# Altium PCB PCB1.PcbDoc
Units mil, origin at the board's own origin, x right, y up, seen from the top; angles counter-clockwise.
Board outline 10255 x 7345 mil, 2 copper layers (Top Layer, Bottom Layer); 112 components, 0 nets, 480 pads, 0 vias.
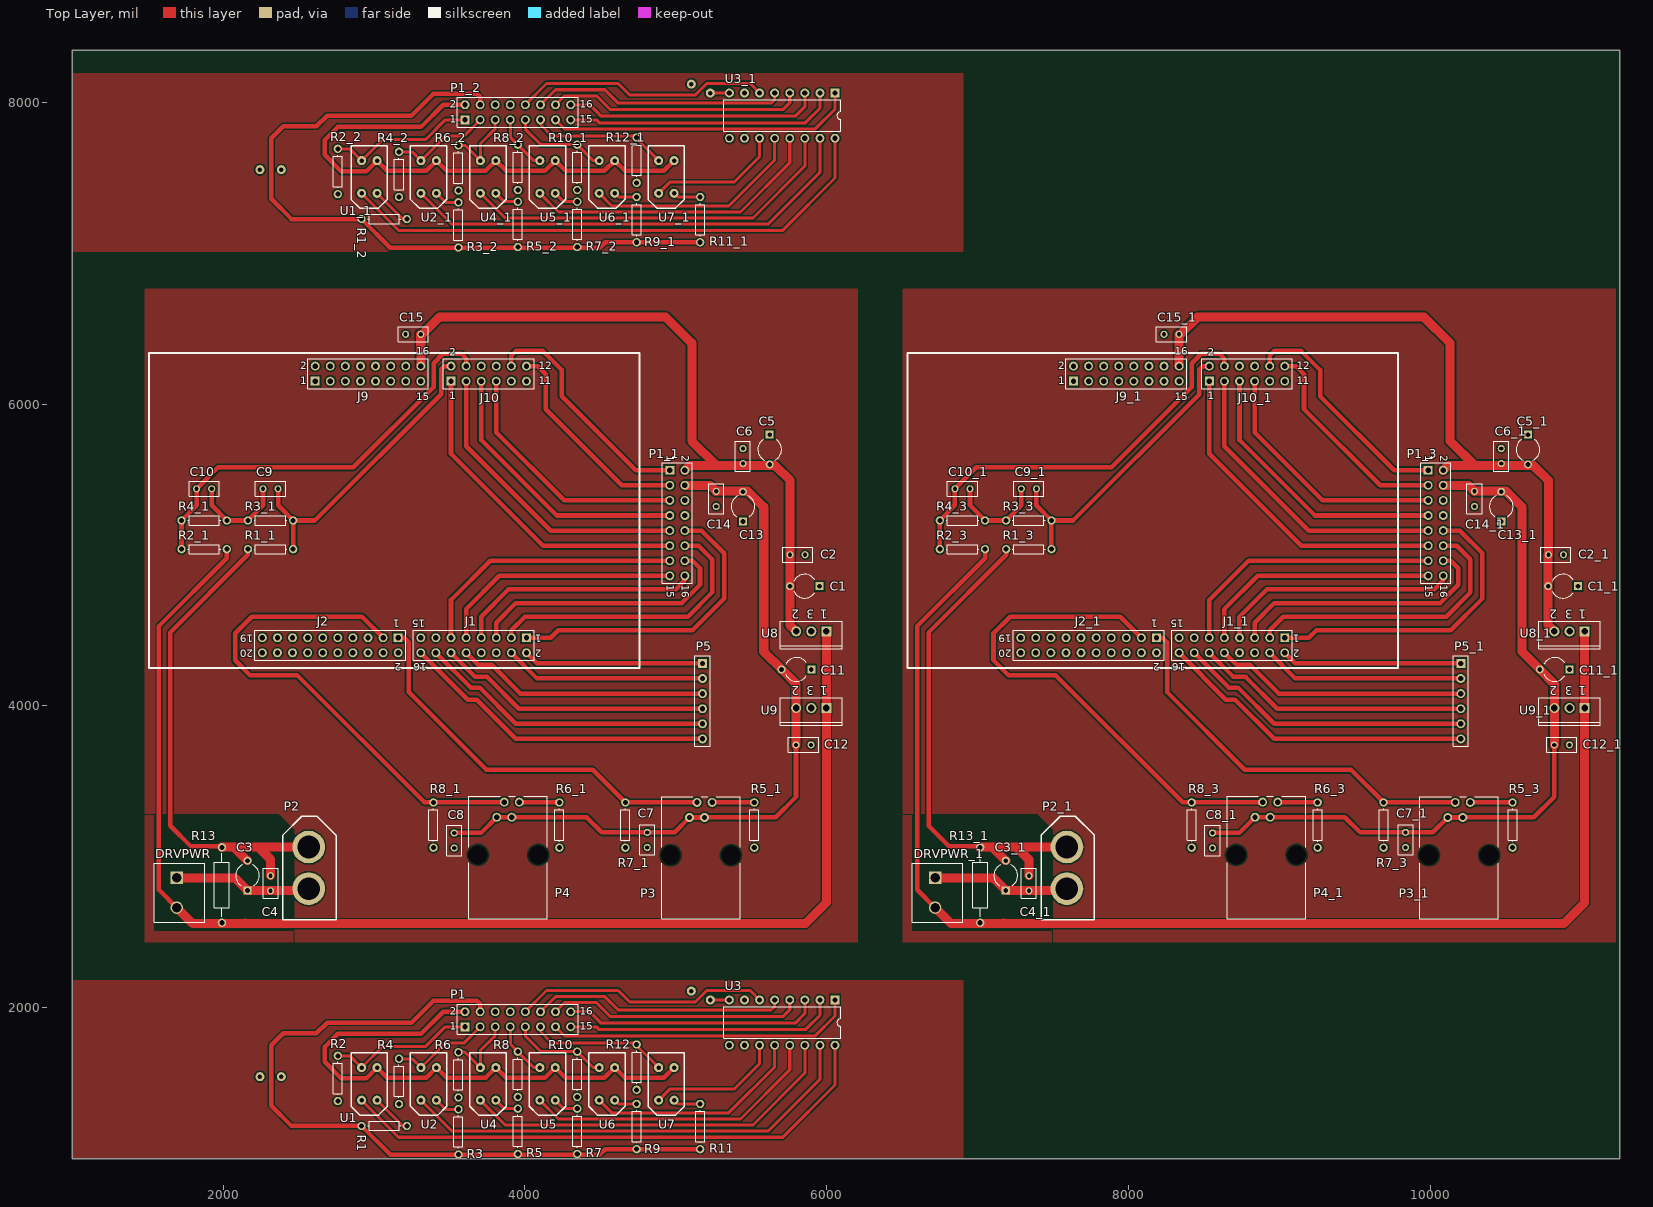
[diagram p0: Top Layer view]
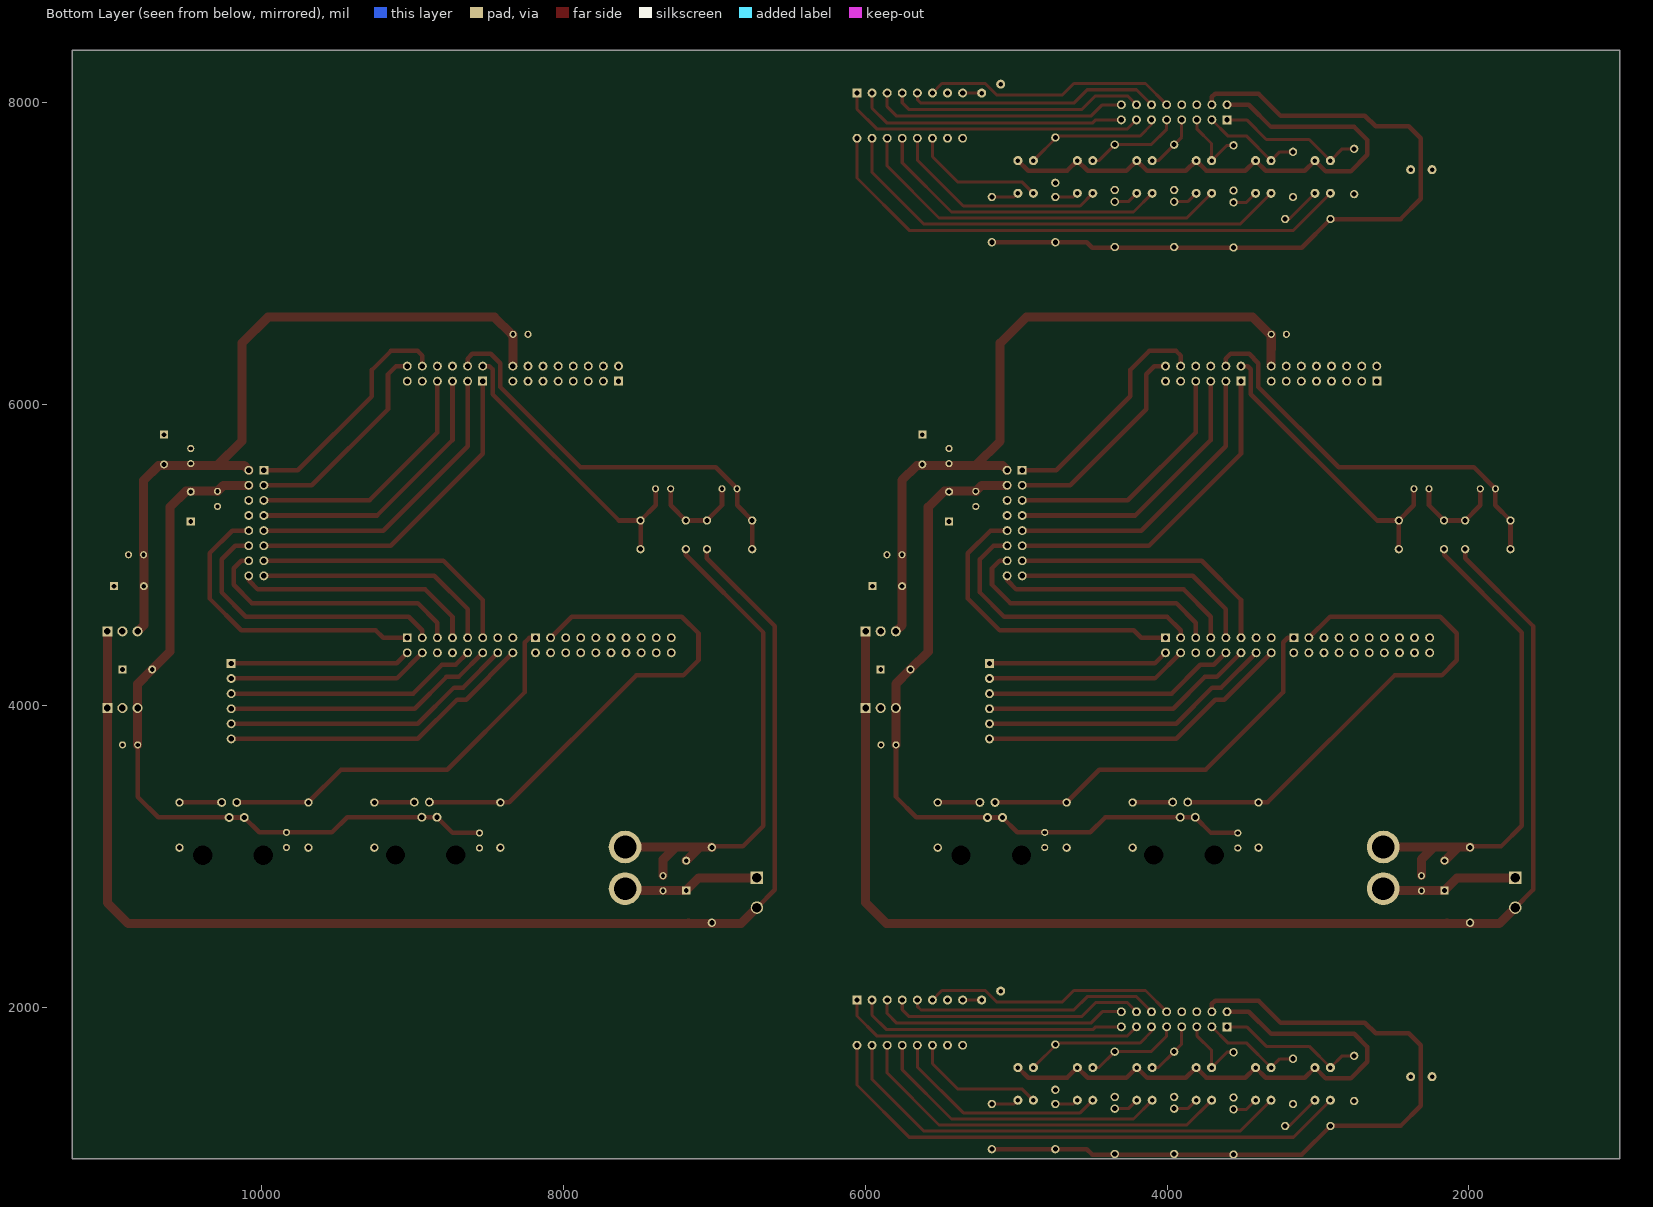
[diagram p1: Bottom Layer view, seen from below]

## Layer stack, top to bottom
Top Solder: solder mask 0.4, Solder Resist, Dk 3.5
Top Layer: signal copper 1.4
Dielectric 1: dielectric 12.6, FR-4, Dk 4.8
Bottom Layer: signal copper 1.4
Bottom Solder: solder mask 0.4, Solder Resist, Dk 3.5

## Board outline
1000,1000 1000,8345 11255,8345 11255,1000

## Design rules (kind name [scope] priority, off if disabled: settings)
Clearance [All] p1: gap=10
PolygonConnect [All] p1: connectstyle=Relief reliefconductorwidth=10 reliefentries=4 polygonreliefangle="90 Angle" airgapwidth=10
RoutingVias [All] p1: holewidth=28 width=50 viastyle="Through Hole" minholewidth=28 minwidth=50 maxholewidth=28 maxwidth=50
SolderMaskExpansion [All] p1: expansion=4
Width [All] p1: maxlimit=60 minlimit=10 preferedwidth=10
30 further rules are at their usual default settings.

## Components (designator, comment, footprint, x,y, rotation, side; value= is the part's Value field where it differs from the comment)
C1 "Cap2" CAPR5-4X5 5854.02,4793.27 r180 top
C1_1 "Cap2" CAPR5-4X5 10879.02,4793.27 r180 top (schematic designator C1)
C2 "Cap" RAD-0.1 5806.77,5001.93 r180 top
C2_1 "Cap" RAD-0.1 10831.77,5001.93 r180 top (schematic designator C2)
C3 "Cap2" CAPR5-4X5 2161.1,2875.94 r90 top
C3_1 "Cap2" CAPR5-4X5 7186.1,2875.94 r90 top (schematic designator C3)
C4 "Cap" RAD-0.1 2314.65,2824.76 r90 top
C4_1 "Cap" RAD-0.1 7339.65,2824.76 r90 top (schematic designator C4)
C5 "Cap2" CAPR5-4X5 5621.73,5698.78 r270 top
C5_1 "Cap2" CAPR5-4X5 10646.73,5698.78 r270 top (schematic designator C5)
C6 "Cap" RAD-0.1 5444.57,5655.47 r270 top
C6_1 "Cap" RAD-0.1 10469.57,5655.47 r270 top (schematic designator C6)
C7 "Cap" RAD-0.1 4810.71,3112.17 r90 top
C7_1 "Cap" RAD-0.1 9835.71,3112.17 r90 top (schematic designator C7)
C8 "Cap" RAD-0.1 3531.18,3108.23 r90 top
C8_1 "Cap" RAD-0.1 8556.18,3108.23 r90 top (schematic designator C8)
C9 "Cap" RAD-0.1 2314.17,5438.78 r0 top
C9_1 "Cap" RAD-0.1 7339.17,5438.78 r0 top (schematic designator C9)
C10 "Cap" RAD-0.1 1874.17,5438.78 r180 top
C10_1 "Cap" RAD-0.1 6899.17,5438.78 r180 top (schematic designator C10)
C11 "Cap2" CAPR5-4X5 5798.9,4242.09 r180 top
C11_1 "Cap2" CAPR5-4X5 10823.9,4242.09 r180 top (schematic designator C11)
C12 "Cap" RAD-0.1 5846.14,3742.09 r180 top
C12_1 "Cap" RAD-0.1 10871.14,3742.09 r180 top (schematic designator C12)
C13 "Cap2" CAPR5-4X5 5444.57,5320.83 r90 top
C13_1 "Cap2" CAPR5-4X5 10469.57,5320.83 r90 top (schematic designator C13)
C14 "Cap" RAD-0.1 5267.4,5372.01 r90 top
C14_1 "Cap" RAD-0.1 10292.4,5372.01 r90 top (schematic designator C14)
C15 "Cap" RAD-0.1 3259.53,6462.56 r0 top
C15_1 "Cap" RAD-0.1 8284.53,6462.56 r0 top (schematic designator C15)
DRVPWR "DRV_PWR" 691311700002 1692.6,2761.77 r270 top
DRVPWR_1 "DRV_PWR" 691311700002 6717.6,2761.77 r270 top (schematic designator DRVPWR)
J1 "Header 8X2" HDR2X8 4010,4451.85 r180 top
J1_1 "Header 8X2" HDR2X8 9035,4451.85 r180 top (schematic designator J1)
J2 "Header 10X2" HDR2X10 3160,4451.85 r180 top
J2_1 "Header 10X2" HDR2X10 8185,4451.85 r180 top (schematic designator J2)
J9 "Header 8X2" HDR2X8 2610,6151.85 r0 top
J9_1 "Header 8X2" HDR2X8 7635,6151.85 r0 top (schematic designator J9)
J10 "Header 6X2" HDR2X6 3510,6151.85 r0 top
J10_1 "Header 6X2" HDR2X6 8535,6151.85 r0 top (schematic designator J10)
P1 "Header 8X2" HDR2X8 3602.76,1873.62 r0 top locked
P1_1 "Header 8X2" HDR2X8 4960,5561.85 r270 top (schematic designator P1)
P1_2 "Header 8X2" HDR2X8 3602.77,7883.62 r0 top locked (schematic designator P1)
P1_3 "Header 8X2" HDR2X8 9985,5561.85 r270 top (schematic designator P1)
P2 "XT60" PCBComponent_1 2566.61,2927.13 r0 top
P2_1 "XT60" PCBComponent_1 7591.61,2927.13 r0 top (schematic designator P2)
P3 "Enc2" 43249-6104 5165.04,2588.54 r0 top
P3_1 "Enc2" 43249-6104 10190.04,2588.54 r0 top (schematic designator P3)
P4 "Enc2" 43249-6104 3888.11,2590.51 r0 top
P4_1 "Enc2" 43249-6104 8913.11,2590.51 r0 top (schematic designator P4)
P5 "Driver" HDR1X6 5176.85,4281.46 r270 top
P5_1 "Driver" HDR1X6 10201.85,4281.46 r270 top (schematic designator P5)
R1 "Res3" AXIAL-0.3 3066.93,1216.54 r0 top
R1_1 "Res3" AXIAL-0.3 2314.17,5038.78 r180 top (schematic designator R1)
R1_2 "Res3" AXIAL-0.3 3066.94,7226.54 r0 top (schematic designator R1)
R1_3 "Res3" AXIAL-0.3 7339.17,5038.78 r180 top (schematic designator R1)
R2 "Res3" AXIAL-0.3 2759.84,1531.5 r270 top
R2_1 "Res3" AXIAL-0.3 1874.17,5038.78 r0 top (schematic designator R2)
R2_2 "Res3" AXIAL-0.3 2759.86,7541.5 r270 top (schematic designator R2)
R2_3 "Res3" AXIAL-0.3 6899.17,5038.78 r0 top (schematic designator R2)
R3 "Res3" AXIAL-0.3 3559.06,1177.17 r90 top
R3_1 "Res3" AXIAL-0.3 2314.17,5228.78 r0 top (schematic designator R3)
R3_2 "Res3" AXIAL-0.3 3559.07,7187.17 r90 top (schematic designator R3)
R3_3 "Res3" AXIAL-0.3 7339.17,5228.78 r0 top (schematic designator R3)
R4 "Res3" AXIAL-0.3 3165.35,1511.81 r270 top
R4_1 "Res3" AXIAL-0.3 1874.17,5228.78 r180 top (schematic designator R4)
R4_2 "Res3" AXIAL-0.3 3165.37,7521.81 r270 top (schematic designator R4)
R4_3 "Res3" AXIAL-0.3 6899.17,5228.78 r180 top (schematic designator R4)
R5 "Res3" AXIAL-0.3 3952.76,1181.1 r90 top
R5_1 "Res3" AXIAL-0.3 5519.37,3210.59 r270 top (schematic designator R5)
R5_2 "Res3" AXIAL-0.3 3952.77,7191.1 r90 top (schematic designator R5)
R5_3 "Res3" AXIAL-0.3 10544.37,3210.59 r270 top (schematic designator R5)
R6 "Res3" AXIAL-0.3 3559.06,1555.12 r270 top
R6_1 "Res3" AXIAL-0.3 4228.11,3210.51 r270 top (schematic designator R6)
R6_2 "Res3" AXIAL-0.3 3559.07,7565.12 r270 top (schematic designator R6)
R6_3 "Res3" AXIAL-0.3 9253.11,3210.51 r270 top (schematic designator R6)
R7 "Res3" AXIAL-0.3 4346.46,1181.1 r90 top
R7_1 "Res3" AXIAL-0.3 4665.04,3210.59 r90 top (schematic designator R7)
R7_2 "Res3" AXIAL-0.3 4346.47,7191.1 r90 top (schematic designator R7)
R7_3 "Res3" AXIAL-0.3 9690.04,3210.59 r90 top (schematic designator R7)
R8 "Res3" AXIAL-0.3 3952.76,1559.06 r270 top
R8_1 "Res3" AXIAL-0.3 3393.39,3210.59 r270 top (schematic designator R8)
R8_2 "Res3" AXIAL-0.3 3952.77,7569.06 r270 top (schematic designator R8)
R8_3 "Res3" AXIAL-0.3 8418.39,3210.59 r270 top (schematic designator R8)
R9 "Res3" AXIAL-0.3 4740.16,1212.6 r90 top
R9_1 "Res3" AXIAL-0.3 4740.17,7222.6 r90 top (schematic designator R9)
R10 "Res3" AXIAL-0.3 4346.46,1559.06 r270 top
R10_1 "Res3" AXIAL-0.3 4346.47,7569.06 r270 top (schematic designator R10)
R11 "Res3" AXIAL-0.3 5161.42,1212.6 r90 top
R11_1 "Res3" AXIAL-0.3 5161.43,7222.6 r90 top (schematic designator R11)
R12 "Res3" AXIAL-0.3 4740.16,1606.3 r270 top
R12_1 "Res3" AXIAL-0.3 4740.17,7616.3 r270 top (schematic designator R12)
R13 "Res3" AXIAL-0.5 1991.81,2812.95 r270 top
R13_1 "Res3" AXIAL-0.5 7016.81,2812.95 r270 top (schematic designator R13)
U1 "TCRT5000" TCRT 3019.7,1603.54 r270 top locked
U1_1 "TCRT5000" TCRT 3019.71,7613.54 r270 top locked (schematic designator U1)
U2 "TCRT5000" TCRT 3413.4,1603.54 r270 top locked
U2_1 "TCRT5000" TCRT 3413.41,7613.54 r270 top locked (schematic designator U2)
U3 "ULN2003AD" N016 5704.72,1901.58 r180 top locked
U3_1 "ULN2003AD" N016 5704.74,7911.57 r180 top locked (schematic designator U3)
U4 "TCRT5000" TCRT 3807.09,1603.54 r270 top locked
U4_1 "TCRT5000" TCRT 3807.11,7613.54 r270 top locked (schematic designator U4)
U5 "TCRT5000" TCRT 4200.79,1603.54 r270 top locked
U5_1 "TCRT5000" TCRT 4200.8,7613.54 r270 top locked (schematic designator U5)
U6 "TCRT5000" TCRT 4594.48,1603.54 r270 top locked
U6_1 "TCRT5000" TCRT 4594.5,7613.54 r270 top locked (schematic designator U6)
U7 "TCRT5000" TCRT 4988.18,1603.54 r270 top locked
U7_1 "TCRT5000" TCRT 4988.2,7613.54 r270 top locked (schematic designator U7)
U8 "L7805ABV" TO220ABN 5897.32,4494.06 r180 top
U8_1 "L7805ABV" TO220ABN 10922.32,4494.06 r180 top (schematic designator U8)
U9 "LM1117 3V3" TO220VW 5897.32,3986.18 r180 top
U9_1 "LM1117 3V3" TO220VW 10922.32,3986.18 r180 top (schematic designator U9)

## Footprints (in the part's own frame and the unit in brackets; to place one, negate y for a bottom-side part, rotate by r counter-clockwise, add the part's x,y. Pads: shape width x height; smd on the part's side, far side on the other; paste and mask are expansions set on the pad)
43249-6104 [mm] "Connector; PCB Jack, Thru-Hole; 1-Port, 6 Positions, 4 Loaded; Unshielded without Lightpipes; Right Angle"
  round 1.5 hole 0.9: 1(-1.905,17.07) 2(-0.635,19.61) 3(0.635,17.07) 4(1.905,19.61)
  round 2.95 hole 3.25 unplated: MH1(-5.08,10.72) MH2(5.08,10.72)
  silkscreen extent -6.6,0 6.6,20.57
691311700002 [mm] "5.00mm - Open Vertical PCB Header - 02p"
  rect 2.1x2.1 hole 1.6: 1(-2.5,0)
  round 2.1 hole 1.6: 2(2.5,0)
  silkscreen extent -5,-3.8 5,4.7, body extent -5,-3.8 5,4.7, height 12.01
AXIAL-0.3 [mm] "Axial Device, Thru-Hole; 2 Leads; 0.3 in Pin Spacing"
  round 1.4 hole 0.85: 1(-3.81,0) 2(3.81,0)
  silkscreen extent -2.77,-0.76 2.77,0.76
AXIAL-0.5 [mm] "Axial Device, Thru-Hole; 2 Leads; 0.5 in Pin Spacing"
  round 1.4 hole 0.85: 1(-6.35,0) 2(6.35,0)
  silkscreen extent -5.33,-1.27 5.33,1.27
CAPR5-4X5 [mm] "Capacitor; 2 Leads"
  rect 1.35x1.35 hole 0.8: 1(-2.5,0)
  round 1.35 hole 0.8: 2(2.5,0)
  silkscreen extent -1.69,-2 1.82,2
HDR1X6 [mm] "Connector; Header; 6 Position"
  rect 1.5x1.5 hole 0.9: 1(0,0)
  round 1.5 hole 0.9: 2(2.54,0) 3(5.08,0) 4(7.62,0) 5(10.16,0) 6(12.7,0)
  silkscreen extent -1.27,-1.27 13.97,1.27
HDR2X6 [mm] "Connector; Header; 6x2 Position"
  rect 1.5x1.5 hole 0.9: 1(0,0)
  round 1.5 hole 0.9: 2(0,2.54) 3(2.54,0) 4(2.54,2.54) 5(5.08,0) 6(5.08,2.54) 7(7.62,0) 8(7.62,2.54) 9(10.16,0) 10(10.16,2.54) 11(12.7,0) 12(12.7,2.54)
  silkscreen extent -1.27,-1.27 13.97,3.81
HDR2X8 [mm] "Connector; Header; 8x2 Position"
  rect 1.5x1.5 hole 0.9: 1(0,0)
  round 1.5 hole 0.9: 2(0,2.54) 3(2.54,0) 4(2.54,2.54) 5(5.08,0) 6(5.08,2.54) 7(7.62,0) 8(7.62,2.54) 9(10.16,0) 10(10.16,2.54) 11(12.7,0) 12(12.7,2.54) 13(15.24,0) 14(15.24,2.54) 15(17.78,0) 16(17.78,2.54)
  silkscreen extent -1.27,-1.27 19.05,3.81
HDR2X10 [mm] "Connector; Header; 10x2 Position"
  rect 1.5x1.5 hole 0.9: 1(0,0)
  round 1.5 hole 0.9: 2(0,2.54) 3(2.54,0) 4(2.54,2.54) 5(5.08,0) 6(5.08,2.54) 7(7.62,0) 8(7.62,2.54) 9(10.16,0) 10(10.16,2.54) 11(12.7,0) 12(12.7,2.54) 13(15.24,0) 14(15.24,2.54) 15(17.78,0) 16(17.78,2.54) 17(20.32,0) 18(20.32,2.54) 19(22.86,0) 20(22.86,2.54)
  silkscreen extent -1.27,-1.27 24.13,3.81
N016 [mm] "DIP; 16 Leads; Row Spacing 7.62 mm; Pitch 2.54 mm"
  rect 1.5x1.5 hole 0.9: 1(-8.89,-3.81)
  round 1.5 hole 0.9: 2(-6.35,-3.81) 3(-3.81,-3.81) 4(-1.27,-3.81) 5(1.27,-3.81) 6(3.81,-3.81) 7(6.35,-3.81) 8(8.89,-3.81) 9(8.89,3.81) 10(6.35,3.81) 11(3.81,3.81) 12(1.27,3.81) 13(-1.27,3.81) 14(-3.81,3.81) 15(-6.35,3.81) 16(-8.89,3.81)
  silkscreen extent -9.85,-2.65 9.85,2.65
PCBComponent_1 [mm]
  round 5.5 hole 3.8: 1(0,3.5) 2(0,-3.5)
  silkscreen extent -4.32,-8.7 4.62,8.7
RAD-0.1 [mm] "Radial Cap, Thru-Hole; 2 Leads; 0.1 in Pin Spacing"
  round 1.2 hole 0.7: 1(-1.27,0) 2(1.27,0)
  silkscreen extent -2.54,-1.27 2.54,1.27
TCRT [mil]
  round 60 hole 30: 1(0,0) 2(0,-102.36) 3(216.53,0) 4(216.53,-102.36)
  silkscreen extent -98,-172 315,69
TO220ABN [mm] "TO, Thru-Hole, Vertical, Heatsink Mounted; 3 In-Line Leads; Pitch 2.54 mm; Pin sequence 1, 3, 2"
  rect 1.7x1.7 hole 1.1: 1(-2.54,0)
  round 1.7 hole 1.1: 2(2.54,0) 3(0,0)
  silkscreen extent -5.2,-1.7 5.2,2.9
TO220VW [mm] "TO, Thru-Hole, Vertical, Heatsink Mounted; 3 In-Line Leads; Pitch 2.54 mm; Pin sequence 1, 3, 2"
  rect 1.7x1.7 hole 1.1: 1(-2.54,0)
  round 1.7 hole 1.1: 2(2.54,0) 3(0,0)
  silkscreen extent -5.2,-1.7 5.2,2.9

## Part data
C1 C1_1 C2 C2_1 C3 C3_1 C4 C4_1 C5 C5_1 C6 C6_1 C7 C7_1 C8 C8_1 C9 C9_1 C10 C10_1 C11 C11_1 C12 C12_1 C13 C13_1 C14 C14_1 C15 C15_1: "Capacitor"
DRVPWR DRVPWR_1: library part 691311700002, "WR-TBL Terminal block - serie 3117 - 5.00mm"
J1 J1_1 J9 J9_1 P1 P1_1 P1_2 P1_3: "Header, 8-Pin, Dual row"
J2 J2_1: "Header, 10-Pin, Dual row"
J10 J10_1: "Header, 6-Pin, Dual row"
P2 P2_1: library part Component_1
P3 P3_1 P4 P4_1: library part 43249-6104, "Right Angle, Low Profile, Flangeless, Unshielded PCB Jack"
P5 P5_1: library part "Header 6", "Header, 6-Pin"
R1 R1_1 R1_2 R1_3 R2 R2_1 R2_2 R2_3 R3 R3_1 R3_2 R3_3 R4 R4_1 R4_2 R4_3 R5 R5_1 R5_2 R5_3 R6 R6_1 R6_2 R6_3 R7 R7_1 R7_2 R7_3 R8 R8_1 R8_2 R8_3 R9 R9_1 R10 R10_1 R11 R11_1 R12 R12_1 R13 R13_1: "Resistor"
U3 U3_1: "Darlington Transistor Array"
U8 U8_1: "Precision 1A Regulator"
U9 U9_1: library part L78S05CV, "2A Positive Voltage Regulator"

## Free pads (board coordinates)
  round 60 hole 30: 0(5228.35,2051.18) 0(5228.36,8061.18) 1(5102.36,2110.24) 1(5102.38,8120.24) 2(2385.83,1543.31) 2(2385.84,7553.31) 3(2244.09,1543.31) 3(2244.11,7553.31)

## Nets (pads, with @x,y where several pads share a name; then routed paths per layer and width w, separated by ;. In a path a pad name is that pad's centre, name@x,y a point inside that pad or via, vN(x,y) a via of type N, cw(c..) or ccw(c..) an arc to the next point about the centre after c; other vN are vias at no path point)
pads on no net: C1.1 C1.2 C1_1.1 C1_1.2 C2.1 C2.2 C2_1.1 C2_1.2 C3.1 C3.2 C3_1.1 C3_1.2 C4.1 C4.2 C4_1.1 C4_1.2 C5.1 C5.2 C5_1.1 C5_1.2 C6.1 C6.2 C6_1.1 C6_1.2 C7.1 C7.2 C7_1.1 C7_1.2 C8.1 C8.2 C8_1.1 C8_1.2 C9.1 C9.2 C9_1.1 C9_1.2 C10.1 C10.2 C10_1.1 C10_1.2 C11.1 C11.2 C11_1.1 C11_1.2 C12.1 C12.2 C12_1.1 C12_1.2 C13.1 C13.2 C13_1.1 C13_1.2 C14.1 C14.2 C14_1.1 C14_1.2 C15.1 C15.2 C15_1.1 C15_1.2 DRVPWR.1 DRVPWR.2 DRVPWR_1.1 DRVPWR_1.2 J1.1 J1.2 J1.3 J1.4 J1.5 J1.6 J1.7 J1.8 J1.9 J1.10 J1.11 J1.12 J1.13 J1.14 J1.15 J1.16 J1_1.1 J1_1.2 J1_1.3 J1_1.4 J1_1.5 J1_1.6 J1_1.7 J1_1.8 J1_1.9 J1_1.10 J1_1.11 J1_1.12 J1_1.13 J1_1.14 J1_1.15 J1_1.16 J2.1 J2.2 J2.3 J2.4 J2.5 J2.6 J2.7 J2.8 J2.9 J2.10 J2.11 J2.12 J2.13 J2.14 J2.15 J2.16 J2.17 J2.18 J2.19 J2.20 J2_1.1 J2_1.2 J2_1.3 J2_1.4 J2_1.5 J2_1.6 J2_1.7 J2_1.8 J2_1.9 J2_1.10 J2_1.11 J2_1.12 J2_1.13 J2_1.14 J2_1.15 J2_1.16 J2_1.17 J2_1.18 J2_1.19 J2_1.20 J9.1 J9.2 J9.3 J9.4 J9.5 J9.6 J9.7 J9.8 J9.9 J9.10 J9.11 J9.12 J9.13 J9.14 J9.15 J9.16 J9_1.1 J9_1.2 J9_1.3 J9_1.4 J9_1.5 J9_1.6 J9_1.7 J9_1.8 J9_1.9 J9_1.10 J9_1.11 J9_1.12 J9_1.13 J9_1.14 J9_1.15 J9_1.16 J10.1 J10.2 J10.3 J10.4 J10.5 J10.6 J10.7 J10.8 J10.9 J10.10 J10.11 J10.12 J10_1.1 J10_1.2 J10_1.3 J10_1.4 J10_1.5 J10_1.6 J10_1.7 J10_1.8 J10_1.9 J10_1.10 J10_1.11 J10_1.12 P1.1 P1.2 P1.3 P1.4 P1.5 P1.6 P1.7 P1.8 P1.9 P1.10 P1.11 P1.12 P1.13 P1.14 P1.15 P1.16 P1_1.1 P1_1.2 P1_1.3 P1_1.4 P1_1.5 P1_1.6 P1_1.7 P1_1.8 P1_1.9 P1_1.10 P1_1.11 P1_1.12 P1_1.13 P1_1.14 P1_1.15 P1_1.16 P1_2.1 P1_2.2 P1_2.3 P1_2.4 P1_2.5 P1_2.6 P1_2.7 P1_2.8 P1_2.9 P1_2.10 P1_2.11 P1_2.12 P1_2.13 P1_2.14 P1_2.15 P1_2.16 P1_3.1 P1_3.2 P1_3.3 P1_3.4 P1_3.5 P1_3.6 P1_3.7 P1_3.8 P1_3.9 P1_3.10 P1_3.11 P1_3.12 P1_3.13 P1_3.14 P1_3.15 P1_3.16 P2.1 P2.2 P2_1.1 P2_1.2 P3.1 P3.2 P3.3 P3.4 P3.MH1 P3.MH2 P3_1.1 P3_1.2 P3_1.3 P3_1.4 P3_1.MH1 P3_1.MH2 P4.1 P4.2 P4.3 P4.4 P4.MH1 P4.MH2 P4_1.1 P4_1.2 P4_1.3 P4_1.4 P4_1.MH1 P4_1.MH2 P5.1 P5.2 P5.3 P5.4 P5.5 P5.6 P5_1.1 P5_1.2 P5_1.3 P5_1.4 P5_1.5 P5_1.6 R1.1 R1.2 R1_1.1 R1_1.2 R1_2.1 R1_2.2 R1_3.1 R1_3.2 R2.1 R2.2 R2_1.1 R2_1.2 R2_2.1 R2_2.2 R2_3.1 R2_3.2 R3.1 R3.2 R3_1.1 R3_1.2 R3_2.1 R3_2.2 R3_3.1 R3_3.2 R4.1 R4.2 R4_1.1 R4_1.2 R4_2.1 R4_2.2 R4_3.1 R4_3.2 R5.1 R5.2 R5_1.1 R5_1.2 R5_2.1 R5_2.2 R5_3.1 R5_3.2 R6.1 R6.2 R6_1.1 R6_1.2 R6_2.1 R6_2.2 R6_3.1 R6_3.2 R7.1 R7.2 R7_1.1 R7_1.2 R7_2.1 R7_2.2 R7_3.1 R7_3.2 R8.1 R8.2 R8_1.1 R8_1.2 R8_2.1 R8_2.2 R8_3.1 R8_3.2 R9.1 R9.2 R9_1.1 R9_1.2 R10.1 R10.2 R10_1.1 R10_1.2 R11.1 R11.2 R11_1.1 R11_1.2 R12.1 R12.2 R12_1.1 R12_1.2 R13.1 R13.2 R13_1.1 R13_1.2 U1.1 U1.2 U1.3 U1.4 U1_1.1 U1_1.2 U1_1.3 U1_1.4 U2.1 U2.2 U2.3 U2.4 U2_1.1 U2_1.2 U2_1.3 U2_1.4 U3.1 U3.2 U3.3 U3.4 U3.5 U3.6 U3.7 U3.8 U3.9 U3.10 U3.11 U3.12 U3.13 U3.14 U3.15 U3.16 U3_1.1 U3_1.2 U3_1.3 U3_1.4 U3_1.5 U3_1.6 U3_1.7 U3_1.8 U3_1.9 U3_1.10 U3_1.11 U3_1.12 U3_1.13 U3_1.14 U3_1.15 U3_1.16 U4.1 U4.2 U4.3 U4.4 U4_1.1 U4_1.2 U4_1.3 U4_1.4 U5.1 U5.2 U5.3 U5.4 U5_1.1 U5_1.2 U5_1.3 U5_1.4 U6.1 U6.2 U6.3 U6.4 U6_1.1 U6_1.2 U6_1.3 U6_1.4 U7.1 U7.2 U7.3 U7.4 U7_1.1 U7_1.2 U7_1.3 U7_1.4 U8.1 U8.2 U8.3 U8_1.1 U8_1.2 U8_1.3 U9.1 U9.2 U9.3 U9_1.1 U9_1.2 U9_1.3
copper on no net: | length 209811.5
  Top Layer w20: 2759.84,1681.5 2839.38,1681.5 2917.34,1603.54 3057.89,1744.1 3342.52,1744.1 3472.05,1873.62 3602.76,1873.62 ; 2759.86,7691.5 2839.4,7691.5 2917.35,7613.54 3057.9,7754.09 3342.54,7754.09 3472.06,7883.62 3602.77,7883.62 ; 2917.34,1387.01 3162.61,1141.73 5708.66,1141.73 6054.72,1487.8 6054.72,1751.57 ; 2917.35,7397.01 3162.63,7151.73 5708.68,7151.73 6054.74,7497.79 6054.74,7761.57 ; 3019.7,1387.01 3190.17,1216.54 3216.93,1216.54 ; 3019.71,7397.01 3190.19,7226.54 3216.95,7226.54 ; 3165.35,1661.81 3252.77,1661.81 3311.03,1603.54 3475.2,1767.72 3598.33,1767.72 3702.76,1872.14 3702.76,1873.62 ; 3165.37,7671.81 3252.78,7671.81 3311.05,7613.54 3475.22,7777.72 3598.35,7777.72 3702.77,7882.14 3702.77,7883.62 ; 3311.03,1387.01 3514.89,1183.15 5612.28,1183.15 5954.72,1525.59 5954.72,1751.57 ; 3311.05,7397.01 3514.91,7193.15 5612.3,7193.15 5954.74,7535.59 5954.74,7761.57 ; 3413.39,1387.01 3473.24,1327.17 3559.06,1327.17 ; 3413.41,7397.01 3473.25,7337.17 3559.07,7337.17 ; 3559.06,1705.12 3603.16,1705.12 3704.73,1603.54 3704.73,1716.54 3802.76,1814.57 3802.76,1873.62 ; 3559.07,7715.12 3603.17,7715.12 3704.74,7613.54 3704.74,7726.54 3802.77,7824.57 3802.77,7883.62 ; 3704.73,1387.01 3868.59,1223.15 5510.55,1223.15 5854.72,1567.32 5854.72,1751.57 ; 3704.74,7397.01 3868.6,7233.15 5510.57,7233.15 5854.74,7577.32 5854.74,7761.57 ; 3807.09,1387.01 3863,1331.1 3952.76,1331.1 ; 3807.11,7397.01 3863.01,7341.1 3952.77,7341.1 ; 3902.76,1873.62 3902.76,1759.06 3952.76,1709.06 4058.27,1603.54 4098.43,1603.54 ; 3902.77,7883.62 3902.77,7769.06 3952.77,7719.06 4058.28,7613.54 4098.44,7613.54 ; 4002.76,1873.62 4002.76,1812.21 4105.91,1709.06 4346.46,1709.06 4451.97,1603.54 4492.12,1603.54 ; 4002.76,1973.62 4143.31,2114.17 4618.11,2114.17 4692.91,2039.37 5129.92,2039.37 5204.72,2114.17 5492.13,2114.17 5554.72,2051.57 ; 4002.77,7883.62 4002.77,7822.2 4105.92,7719.06 4346.47,7719.06 4451.98,7613.54 4492.14,7613.54 ; 4002.77,7983.62 4143.32,8124.17 4618.13,8124.17 4692.93,8049.37 5129.94,8049.37 5204.74,8124.17 5492.14,8124.17 5554.74,8061.57 ; 4098.43,1387.01 4222.29,1263.15 5428.5,1263.15 5754.72,1589.37 5754.72,1751.57 ; 4098.44,7397.01 4222.3,7273.15 5428.52,7273.15 5754.74,7599.37 5754.74,7761.57 ; 4102.76,1873.62 4102.76,1842.13 4178.27,1766.61 4722.75,1766.61 4885.82,1603.54 ; 4102.76,1973.62 4202.28,2073.15 4529.21,2073.15 4618.11,1984.25 5629.92,1984.25 5654.72,2009.06 5654.72,2051.57 ; 4102.77,7883.62 4102.77,7852.13 4178.28,7776.61 4722.76,7776.61 4885.83,7613.54 ; 4102.77,7983.62 4202.3,8083.15 4529.23,8083.15 4618.13,7994.25 5629.94,7994.25 5654.74,8019.05 5654.74,8061.57 ; 4200.79,1387.01 4256.7,1331.1 4346.46,1331.1 ; 4200.8,7397.01 4256.71,7341.1 4346.47,7341.1 ; 4202.76,1873.62 4262.28,1814.09 5924.33,1814.09 6054.72,1944.49 6054.72,2051.57 ; 4202.76,1973.62 4262.28,2033.15 4474.72,2033.15 4566.93,1940.95 5708.66,1940.95 5754.72,1987.01 5754.72,2051.57 ; 4202.77,7883.62 4262.3,7824.09 5924.35,7824.09 6054.74,7954.49 6054.74,8061.57 ; 4202.77,7983.62 4262.3,8043.15 4474.74,8043.15 4566.94,7950.94 5708.68,7950.94 5754.74,7997.01 5754.74,8061.57 ; 4302.76,1873.62 4472.44,1873.62 4491.73,1854.33 5858.27,1854.33 5954.72,1950.79 5954.72,2051.57 ; 4302.76,1973.62 4429.21,1973.62 4473.07,1929.76 4505.2,1897.64 5791.34,1897.64 5854.72,1961.02 5854.72,2051.57 ; 4302.77,7883.62 4472.46,7883.62 4491.75,7864.33 5858.28,7864.33 5954.74,7960.79 5954.74,8061.57 ; 4302.77,7983.62 4429.23,7983.62 4473.09,7939.76 4505.21,7907.64 5791.35,7907.64 5854.74,7971.02 5854.74,8061.57 ; 4492.12,1387.01 4575.98,1303.15 5350.39,1303.15 5654.72,1607.48 5654.72,1751.57 ; 4492.14,7397.01 4576,7313.15 5350.41,7313.15 5654.74,7617.48 5654.74,7761.57 ; 4594.48,1387.01 4619.29,1362.21 4724.01,1362.21 4740.16,1378.35 ; 4594.5,7397.01 4619.3,7372.2 4724.03,7372.2 4740.17,7388.35 ; 4885.82,1387.01 4959.44,1460.63 5385.83,1460.63 5554.72,1629.53 5554.72,1751.57 ; 4885.83,7397.01 4959.46,7470.63 5385.84,7470.63 5554.74,7639.53 5554.74,7761.57 ; 4988.18,1387.01 5012.98,1362.21 5145.28,1362.21 5161.42,1378.35 ; 4988.2,7397.01 5013,7372.2 5145.29,7372.2 5161.43,7388.35 ; 5228.74,2051.57 5354.72,2051.57 ; 5228.76,8061.57 5354.74,8061.57
  Top Layer w30: 1692.6,2663.35 1574.49,2781.46 1574.49,4529.09 2024.17,4978.78 2024.17,5038.78 ; 1724.17,5038.78 1724.17,5228.78 1824.17,5328.78 1824.17,5438.78 1966.06,5580.67 2861.89,5580.67 3394.57,6113.35 3394.57,6270.83 3456.38,6332.64 3579.17,6332.64 3610,6301.81 3610,6251.85 ; 1924.17,5438.78 1924.17,5328.78 2024.17,5228.78 2164.17,5228.78 2264.17,5328.78 2264.17,5438.78 ; 1991.81,3062.95 1985.91,3068.86 1787.09,3068.86 1649.29,3206.65 1649.29,4486.18 2164.17,5001.06 2164.17,5038.78 ; 2364.17,5438.78 2364.17,5328.78 2464.17,5228.78 ; 2464.17,5038.78 2464.17,5228.78 ; 3060,4451.85 2920,4591.85 2190,4591.85 2080,4481.85 2080,4301.85 2180,4201.85 2492.68,4201.85 3333.94,3360.59 3393.39,3360.59 3395.35,3362.56 3863.11,3362.56 ; 3160,4451.85 3200,4451.85 3230,4421.85 3230,4091.85 3745.12,3576.73 4448.9,3576.73 4665.04,3360.59 5140.04,3360.59 ; 3310,4351.85 3620,4041.85 3680,4041.85 3940,3781.85 5176.85,3781.85 ; 3410,4351.85 3640,4121.85 3700,4121.85 3940,3881.85 5176.85,3881.85 ; 3510,4351.85 3670,4191.85 3750,4191.85 3960,3981.85 5176.85,3981.85 ; 3510,4451.85 3510,4701.85 3770,4961.85 4960,4961.85 ; 3510,6151.85 3510,5671.85 4120,5061.85 4960,5061.85 ; 3510,6251.85 3466.14,6251.85 3444.57,6230.28 3444.57,6066.42 2606.93,5228.78 2464.17,5228.78 ; 3531.18,3158.23 3708.78,3158.23 3813.11,3262.56 3913.11,3262.56 4408.35,3262.56 4508.74,3162.17 4810.71,3162.17 4991.61,3162.17 5090.04,3260.59 5190.04,3260.59 5191.22,3261.77 5661.1,3261.77 5796.14,3396.81 5796.14,3742.09 ; 3602.76,1973.62 3457.87,1973.62 3311.02,1826.77 2759.84,1826.77 2673.23,1740.16 2673.23,1641.73 2783.47,1531.5 2947.65,1531.5 3019.7,1603.54 3087.81,1535.43 3345.28,1535.43 3413.39,1603.54 3481.51,1535.43 3738.98,1535.43 3807.09,1603.54 3875.2,1535.43 4132.68,1535.43 4200.79,1603.54 4268.9,1535.43 4526.37,1535.43 4594.48,1603.54 4662.6,1535.43 4920.07,1535.43 4988.18,1603.54 ; 3602.77,7983.62 3457.89,7983.62 3311.04,7836.77 2759.86,7836.77 2673.24,7750.16 2673.24,7651.73 2783.48,7541.5 2947.67,7541.5 3019.71,7613.54 3087.82,7545.43 3345.3,7545.43 3413.41,7613.54 3481.52,7545.43 3739,7545.43 3807.11,7613.54 3875.22,7545.43 4132.69,7545.43 4200.8,7613.54 4268.91,7545.43 4526.39,7545.43 4594.5,7613.54 4662.61,7545.43 4920.08,7545.43 4988.2,7613.54 ; 3610,4351.85 3690,4271.85 3780,4271.85 3970,4081.85 5176.85,4081.85 ; 3610,4451.85 3610,4641.85 3830,4861.85 4960,4861.85 ; 3610,6151.85 3610,5721.85 4170,5161.85 4960,5161.85 ; 3702.76,1973.62 3702.76,2025.59 3681.1,2047.24 3393.7,2047.24 3248.03,1901.58 2688.98,1901.58 2618.11,1830.71 2397.64,1830.71 2318.9,1751.97 2318.9,1350.39 2452.76,1216.54 2916.93,1216.54 3106.3,1027.17 3559.06,1027.17 4495.67,1027.17 4531.1,1062.6 4740.16,1062.6 5161.42,1062.6 ; 3702.77,7983.62 3702.77,8035.59 3681.12,8057.24 3393.72,8057.24 3248.05,7911.57 2688.99,7911.57 2618.13,7840.71 2397.65,7840.71 2318.91,7761.97 2318.91,7360.39 2452.77,7226.54 2916.95,7226.54 3106.32,7037.17 3559.07,7037.17 4495.68,7037.17 4531.12,7072.6 4740.17,7072.6 5161.43,7072.6 ; 3710,4451.85 3710,4591.85 3890,4771.85 5000,4771.85 5060,4831.85 5060,4861.85 ; 3710,6151.85 3710,5761.85 4210,5261.85 4960,5261.85 ; 3810,4451.85 3810,4551.85 3940,4681.85 5040,4681.85 5160,4801.85 5160,4911.85 5110,4961.85 5060,4961.85 ; 3810,6151.85 3810,5811.85 4260,5361.85 4960,5361.85 ; 3910,4351.85 4080,4181.85 5176.85,4181.85 ; 3910,4451.85 3910,4501.85 4000,4591.85 5080,4591.85 5240,4751.85 5240,4971.85 5150,5061.85 5060,5061.85 ; 3910,6251.85 3910,6321.69 3940.63,6352.32 4117.8,6352.32 4243.78,6226.34 4243.78,6053.11 4735.04,5561.85 4960,5561.85 ; 3963.11,3362.56 3965.16,3360.51 4228.11,3360.51 ; 4010,4351.85 4080,4281.85 5176.85,4281.85 ; 4010,4451.85 4170,4451.85 4220,4501.85 5110,4501.85 5320,4711.85 5320,5011.85 5170,5161.85 5060,5161.85 ; 4010,6251.85 4084.41,6251.85 4137.48,6198.78 4137.48,5966.5 4642.13,5461.85 4960,5461.85 ; 5240.04,3360.59 5519.37,3360.59 ; 6717.6,2663.35 6599.49,2781.46 6599.49,4529.09 7049.17,4978.78 7049.17,5038.78 ; 6749.17,5038.78 6749.17,5228.78 6849.17,5328.78 6849.17,5438.78 6991.06,5580.67 7886.89,5580.67 8419.57,6113.35 8419.57,6270.83 8481.38,6332.64 8604.17,6332.64 8635,6301.81 8635,6251.85 ; 6949.17,5438.78 6949.17,5328.78 7049.17,5228.78 7189.17,5228.78 7289.17,5328.78 7289.17,5438.78 ; 7016.81,3062.95 7010.91,3068.86 6812.09,3068.86 6674.29,3206.65 6674.29,4486.18 7189.17,5001.06 7189.17,5038.78 ; 7389.17,5438.78 7389.17,5328.78 7489.17,5228.78 ; 7489.17,5038.78 7489.17,5228.78 ; 8085,4451.85 7945,4591.85 7215,4591.85 7105,4481.85 7105,4301.85 7205,4201.85 7517.68,4201.85 8358.94,3360.59 8418.39,3360.59 8420.35,3362.56 8888.11,3362.56 ; 8185,4451.85 8225,4451.85 8255,4421.85 8255,4091.85 8770.12,3576.73 9473.9,3576.73 9690.04,3360.59 10165.04,3360.59 ; 8335,4351.85 8645,4041.85 8705,4041.85 8965,3781.85 10201.85,3781.85 ; 8435,4351.85 8665,4121.85 8725,4121.85 8965,3881.85 10201.85,3881.85 ; 8535,4351.85 8695,4191.85 8775,4191.85 8985,3981.85 10201.85,3981.85 ; 8535,4451.85 8535,4701.85 8795,4961.85 9985,4961.85 ; 8535,6151.85 8535,5671.85 9145,5061.85 9985,5061.85 ; 8535,6251.85 8491.14,6251.85 8469.57,6230.28 8469.57,6066.42 7631.93,5228.78 7489.17,5228.78 ; 8556.18,3158.23 8733.78,3158.23 8838.11,3262.56 8938.11,3262.56 9433.35,3262.56 9533.74,3162.17 9835.71,3162.17 10016.61,3162.17 10115.04,3260.59 10215.04,3260.59 10216.22,3261.77 10686.1,3261.77 10821.14,3396.81 10821.14,3742.09 ; 8635,4351.85 8715,4271.85 8805,4271.85 8995,4081.85 10201.85,4081.85 ; 8635,4451.85 8635,4641.85 8855,4861.85 9985,4861.85 ; 8635,6151.85 8635,5721.85 9195,5161.85 9985,5161.85 ; 8735,4451.85 8735,4591.85 8915,4771.85 10025,4771.85 10085,4831.85 10085,4861.85 ; 8735,6151.85 8735,5761.85 9235,5261.85 9985,5261.85 ; 8835,4451.85 8835,4551.85 8965,4681.85 10065,4681.85 10185,4801.85 10185,4911.85 10135,4961.85 10085,4961.85 ; 8835,6151.85 8835,5811.85 9285,5361.85 9985,5361.85 ; 8935,4351.85 9105,4181.85 10201.85,4181.85 ; 8935,4451.85 8935,4501.85 9025,4591.85 10105,4591.85 10265,4751.85 10265,4971.85 10175,5061.85 10085,5061.85 ; 8935,6251.85 8935,6321.69 8965.63,6352.32 9142.8,6352.32 9268.78,6226.34 9268.78,6053.11 9760.04,5561.85 9985,5561.85 ; 8988.11,3362.56 8990.16,3360.51 9253.11,3360.51 ; 9035,4351.85 9105,4281.85 10201.85,4281.85 ; 9035,4451.85 9195,4451.85 9245,4501.85 10135,4501.85 10345,4711.85 10345,5011.85 10195,5161.85 10085,5161.85 ; 9035,6251.85 9109.41,6251.85 9162.48,6198.78 9162.48,5966.5 9667.13,5461.85 9985,5461.85 ; 10265.04,3360.59 10544.37,3360.59
  Top Layer w60: 1692.6,2663.35 1798.9,2557.05 2149.29,2557.05 ; 1692.6,2860.2 2078.43,2860.2 2161.1,2777.52 2483.94,2777.52 ; 1991.81,3062.95 1993.78,3064.92 2070.55,3064.92 ; 2145.35,2560.98 2149.29,2557.05 ; 2161.1,2974.37 2070.55,3064.92 ; 2314.65,2874.76 2314.65,2982.24 2231.97,3064.92 ; 2495.75,2789.33 2483.94,2777.52 ; 2566.61,2789.33 2554.8,2777.52 2483.94,2777.52 ; 2566.61,3064.92 2231.97,3064.92 ; 3310,6251.85 3310,6364.84 3309.53,6365.31 3309.53,6462.56 3318.58,6462.56 3432.76,6576.73 4932.76,6576.73 5105.98,6403.5 5105.98,5755.08 5267.4,5593.66 ; 5060,5461.85 5227.56,5461.85 5267.4,5422.01 5268.58,5423.19 5476.06,5423.19 5582.36,5316.89 5582.36,4360.2 5700.47,4242.09 5797.32,4145.24 5797.32,3986.18 5797.32,3743.27 5796.14,3742.09 ; 5060,5561.85 5091.81,5593.66 5267.4,5593.66 ; 5797.32,4494.06 5755.59,4535.79 5755.59,4793.27 5755.59,5000.75 5756.77,5001.93 5756.77,5494.06 5658.35,5592.48 5476.06,5592.48 5474.88,5593.66 5267.4,5593.66 ; 5997.32,4494.06 5997.32,3986.18 5997.32,2696.42 5857.95,2557.05 2149.29,2557.05 ; 6717.6,2663.35 6823.9,2557.05 7174.29,2557.05 ; 6717.6,2860.2 7103.43,2860.2 7186.1,2777.52 7508.94,2777.52 ; 7016.81,3062.95 7018.78,3064.92 7095.55,3064.92 ; 7170.35,2560.98 7174.29,2557.05 ; 7186.1,2974.37 7095.55,3064.92 ; 7339.65,2874.76 7339.65,2982.24 7256.97,3064.92 ; 7520.75,2789.33 7508.94,2777.52 ; 7591.61,2789.33 7579.8,2777.52 7508.94,2777.52 ; 7591.61,3064.92 7256.97,3064.92 ; 8335,6251.85 8335,6364.84 8334.53,6365.31 8334.53,6462.56 8343.58,6462.56 8457.76,6576.73 9957.76,6576.73 10130.98,6403.5 10130.98,5755.08 10292.4,5593.66 ; 10085,5461.85 10252.56,5461.85 10292.4,5422.01 10293.58,5423.19 10501.06,5423.19 10607.36,5316.89 10607.36,4360.2 10725.47,4242.09 10822.32,4145.24 10822.32,3986.18 10822.32,3743.27 10821.14,3742.09 ; 10085,5561.85 10116.81,5593.66 10292.4,5593.66 ; 10822.32,4494.06 10780.59,4535.79 10780.59,4793.27 10780.59,5000.75 10781.77,5001.93 10781.77,5494.06 10683.35,5592.48 10501.06,5592.48 10499.88,5593.66 10292.4,5593.66 ; 11022.32,4494.06 11022.32,3986.18 11022.32,2696.42 10882.95,2557.05 7174.29,2557.05 ; 2070.55,3064.92 2231.97,3064.92 ; 7095.55,3064.92 7256.97,3064.92

## Polygon pours and split planes (outlines as drawn)
no net on Top Layer "Top Layer-No Net" (solid, pour order 6): 6505,6765.71 11229.41,6765.71 11229.41,2435 7508.94,2435 7505,2435 7501.06,2435 7501.06,3096.42 7501.06,3179.09 7394.76,3285.39 6505,3285.39
no net on Top Layer "Top Layer-No Net" (solid, pour order 8): 6564.19,3285.39 6564.19,2506 6564.06,2505.87 6564.81,2506.62 7501.06,2506.62 7501.06,2435 6505,2435 6505,3285.39
no net on Top Layer "Top Layer-No Net" (solid, pour order 3): 1000.02,8191.1 1000.02,7010 6905.53,7010 6905.53,8191.1
no net on Top Layer "Top Layer-No Net" (solid, pour order 6): 1480,6765.71 6204.41,6765.71 6204.41,2435 2483.94,2435 2480,2435 2476.06,2435 2476.06,3096.42 2476.06,3179.09 2369.76,3285.39 1480,3285.39
no net on Top Layer "Top Layer-No Net" (solid, pour order 8): 1539.19,3285.39 1539.19,2506 1539.06,2505.87 1539.81,2506.62 2476.06,2506.62 2476.06,2435 1480,2435 1480,3285.39
no net on Top Layer "Top Layer-No Net" (solid, pour order 3): 1000,2181.1 1000,1000 6905.51,1000 6905.51,2181.1

## Silkscreen, mask and mechanical layers (free items; w line width, h text height)
Top Overlay:
  lines w13.78: 1510,4251.85 4760,4251.85 4760,6338.46 1510,6338.46 1510,4251.85 ; 6535,4251.85 9785,4251.85 9785,6338.46 6535,6338.46 6535,4251.85
Mechanical 1:
  lines w10: 1590.55,1393.7 6314.96,1393.7 ; 1590.57,7403.7 6314.98,7403.7 ; 3952.76,1000 3952.76,2181.1 ; 3952.75,1390.94 3952.75,1486.42 ; 3952.76,1788.38 3952.76,2066.93 ; 3952.77,7010 3952.77,8191.1 ; 3952.76,7400.94 3952.76,7496.42 ; 3952.77,7798.38 3952.77,8076.93 ; 1000,1000 11255,1000 11255,8345 1000,8345 1000,1000 ; 1000,1000 6905.51,1000 6905.51,2181.1 1000,2181.1 1000,1000 ; 1000.02,7010 1000.02,8191.1 6905.53,8191.1 6905.53,7010 1000.02,7010 ; 1480,2435 1480,6765.71 6204.41,6765.71 6204.41,2435 1480,2435 ; 6505,2435 6505,6765.71 11229.41,6765.71 11229.41,2435 6505,2435

## Text inside footprints (layer, text, board x,y; h text height)
J1: Top Overlay "16" at 3350,4281.85 h50 r180; Top Overlay "15" at 3340,4571.85 h50 r180; Top Overlay "1" at 4110,4471.85 h50 r180; Top Overlay "2" at 4110,4371.85 h50 r180
J1_1: Top Overlay "16" at 8375,4281.85 h50 r180; Top Overlay "15" at 8365,4571.85 h50 r180; Top Overlay "1" at 9135,4471.85 h50 r180; Top Overlay "2" at 9135,4371.85 h50 r180
J2: Top Overlay "2" at 3180,4281.85 h50 r180; Top Overlay "1" at 3170,4571.85 h50 r180; Top Overlay "19" at 2200,4471.85 h50 r180; Top Overlay "20" at 2200,4371.85 h50 r180
J2_1: Top Overlay "2" at 8205,4281.85 h50 r180; Top Overlay "1" at 8195,4571.85 h50 r180; Top Overlay "19" at 7225,4471.85 h50 r180; Top Overlay "20" at 7225,4371.85 h50 r180
J9: Top Overlay "16" at 3280,6326.85 h50; Top Overlay "15" at 3280,6026.85 h50; Top Overlay "1" at 2510,6131.85 h50; Top Overlay "2" at 2510,6231.85 h50
J9_1: Top Overlay "16" at 8305,6326.85 h50; Top Overlay "15" at 8305,6026.85 h50; Top Overlay "1" at 7535,6131.85 h50; Top Overlay "2" at 7535,6231.85 h50
J10: Top Overlay "2" at 3500,6321.85 h50; Top Overlay "1" at 3500,6031.85 h50; Top Overlay "1" at 4090,6131.85 h50; Top Overlay "1" at 4130,6131.85 h50; Top Overlay "12" at 4090,6231.85 h50
J10_1: Top Overlay "2" at 8525,6321.85 h50; Top Overlay "1" at 8525,6031.85 h50; Top Overlay "1" at 9115,6131.85 h50; Top Overlay "1" at 9155,6131.85 h50; Top Overlay "12" at 9115,6231.85 h50
P1: Top Overlay "2" at 3502.76,1953.62 h50; Top Overlay "1" at 3502.76,1853.62 h50; Top Overlay "15" at 4362.76,1853.62 h50; Top Overlay "16" at 4362.76,1953.62 h50
P1_1: Top Overlay "16" at 5040,4801.85 h50 r270; Top Overlay "15" at 4940,4801.85 h50 r270; Top Overlay "1" at 4940,5661.85 h50 r270; Top Overlay "2" at 5040,5661.85 h50 r270
P1_2: Top Overlay "2" at 3502.77,7963.62 h50; Top Overlay "1" at 3502.77,7863.62 h50; Top Overlay "15" at 4362.77,7863.62 h50; Top Overlay "16" at 4362.77,7963.62 h50
P1_3: Top Overlay "16" at 10065,4801.85 h50 r270; Top Overlay "15" at 9965,4801.85 h50 r270; Top Overlay "1" at 9965,5661.85 h50 r270; Top Overlay "2" at 10065,5661.85 h50 r270
U8: Top Overlay "3" at 5917.01,4638.74 h59.06 r180; Top Overlay "2" at 5817.01,4638.74 h59.06 r180; Top Overlay "1" at 6007.17,4638.74 h59.06 r180
U8_1: Top Overlay "3" at 10942.01,4638.74 h59.06 r180; Top Overlay "2" at 10842.01,4638.74 h59.06 r180; Top Overlay "1" at 11032.17,4638.74 h59.06 r180
U9: Top Overlay "1" at 6007.17,4130.87 h59.06 r180; Top Overlay "2" at 5817.01,4130.87 h59.06 r180; Top Overlay "3" at 5917.01,4130.87 h59.06 r180
U9_1: Top Overlay "1" at 11032.17,4130.87 h59.06 r180; Top Overlay "2" at 10842.01,4130.87 h59.06 r180; Top Overlay "3" at 10942.01,4130.87 h59.06 r180